# Altium PCB Moo1.1.PcbDoc
Units mil, origin at the board's own origin, x right, y up, seen from the top; angles counter-clockwise.
Board outline 1200 x 889 mil, 4 copper layers (Top Layer, GND_Plane, Signal_Layer, Bottom Layer), stack 28.2 mil thick; 69 components, 77 nets, 286 pads, 55 vias.
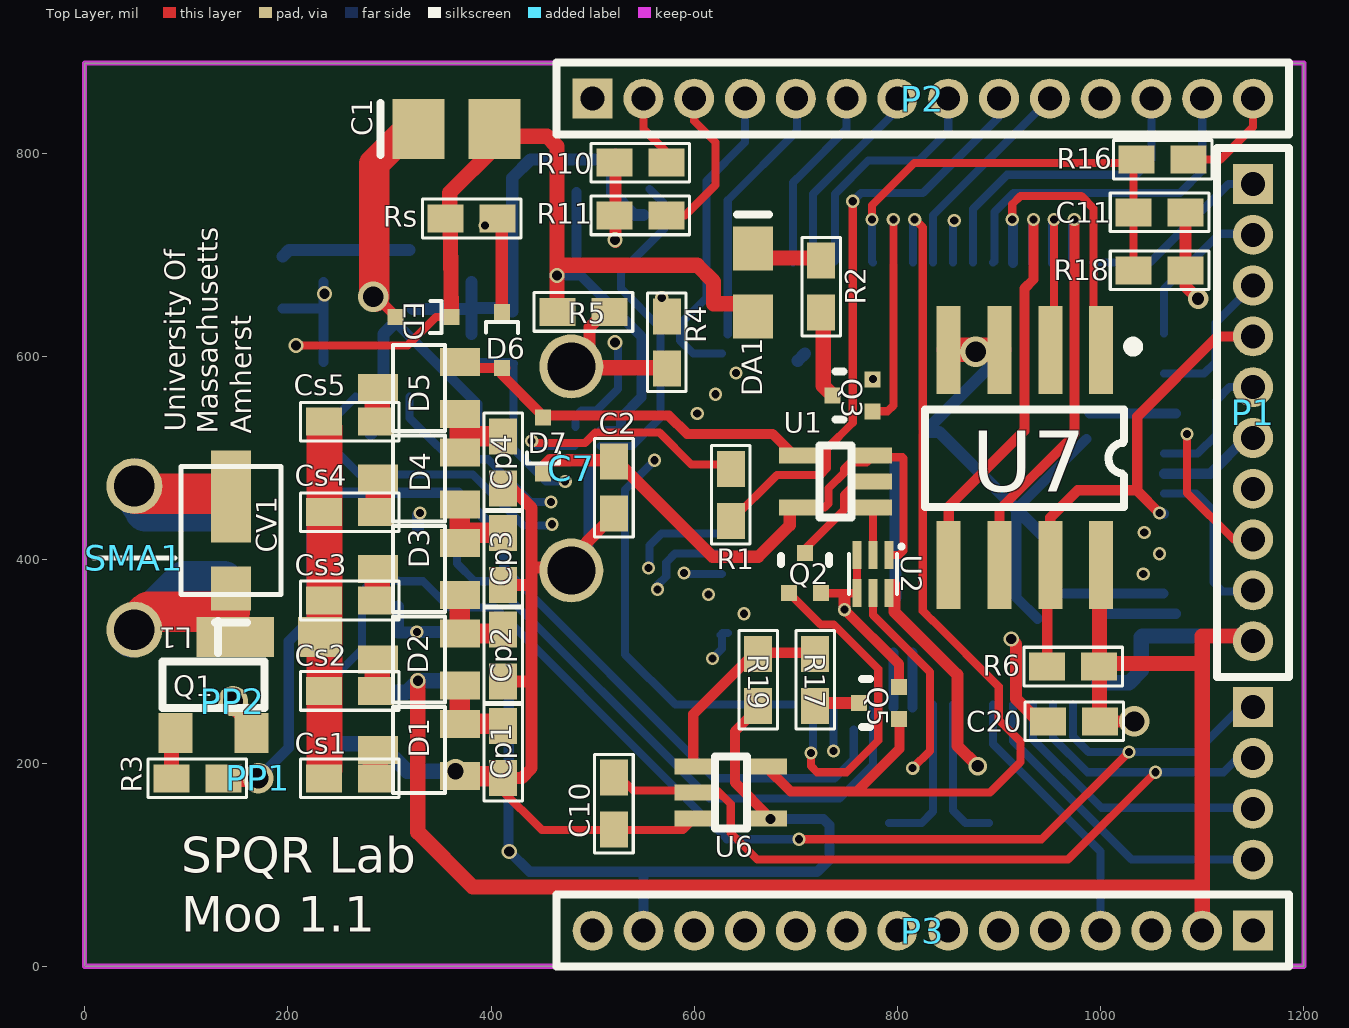
[diagram p0: Top Layer view]
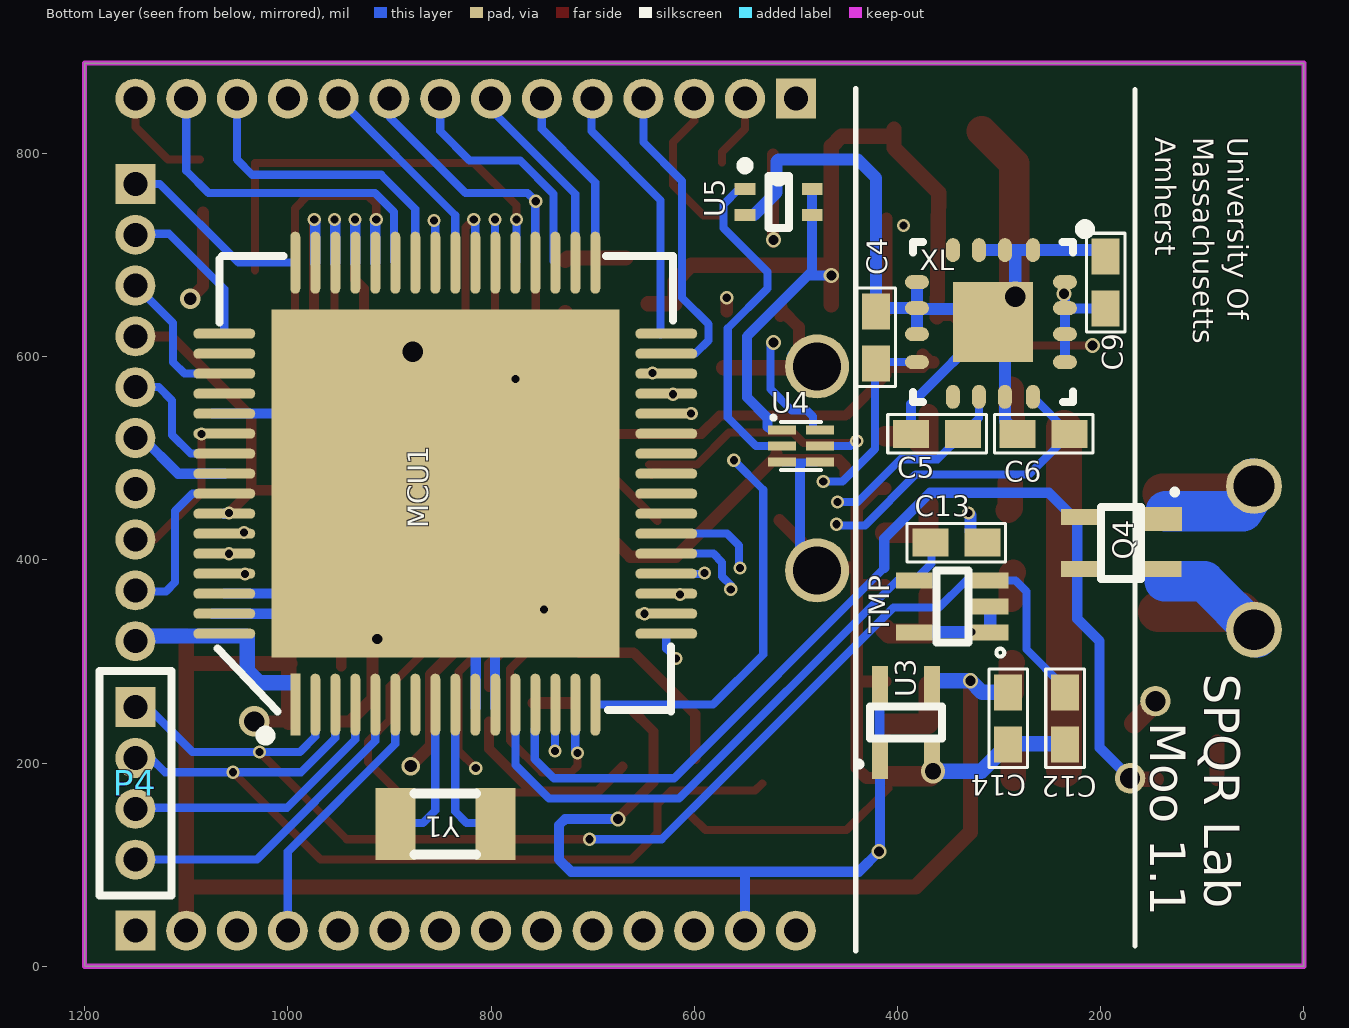
[diagram p1: Bottom Layer view, seen from below]
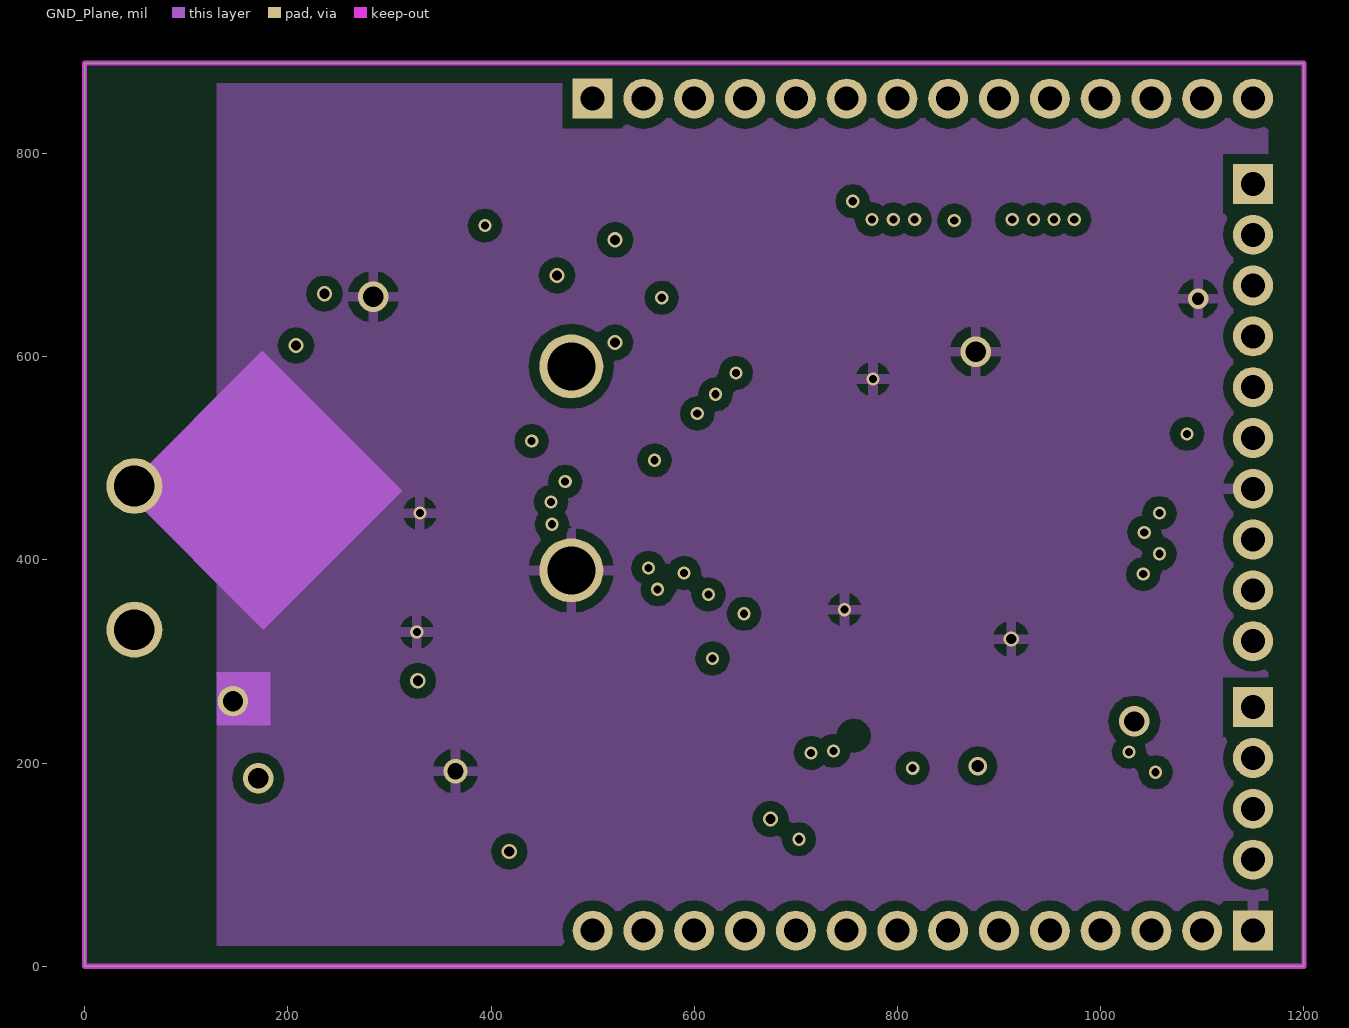
[diagram p2: GND_Plane]
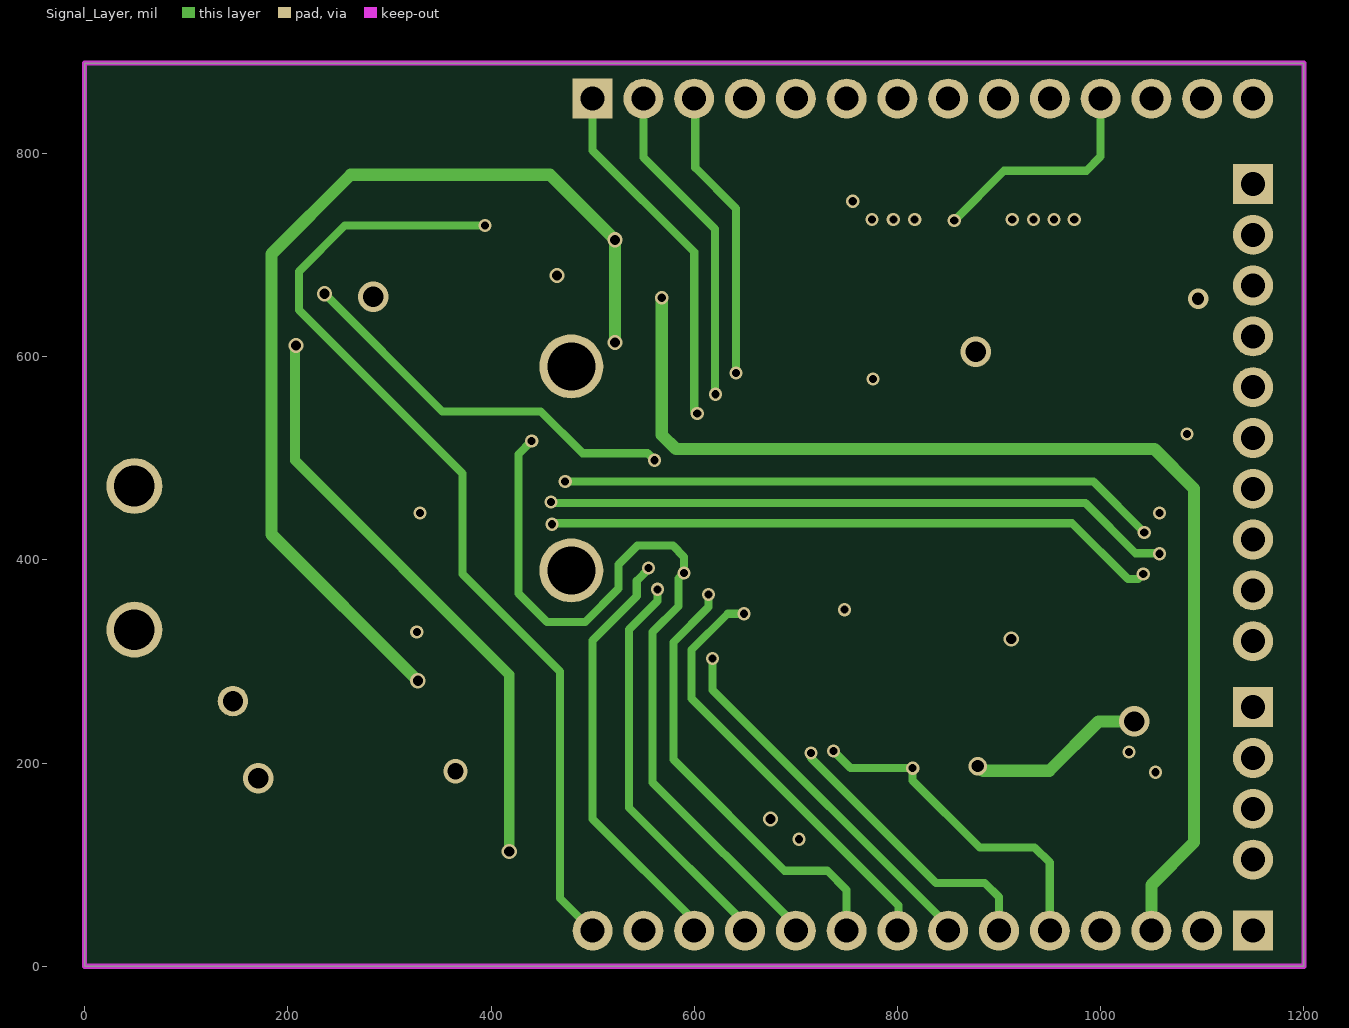
[diagram p3: Signal_Layer]

## Layer stack, top to bottom
Top Layer: signal copper 1.4
Dielectric: prepreg 8.8, FR-4, Dk 4.8
GND_Plane: signal copper 1.4
Dielectric: core 5, FR-4, Dk 4.8
Signal_Layer: signal copper 1.4
Dielectric: prepreg 8.8, FR-4, Dk 4.8
Bottom Layer: signal copper 1.4

## Board outline
0,0 1200,0 1200,889 0,889

## Design rules (kind name [scope] priority, off if disabled: settings)
Clearance Clearance_Inner [(OnLayer('GND_Plane') OR OnLayer('Signal_Layer'))] p1: gap=10
Clearance Clearance_Outer [(OnLayer('Bottom Layer') OR OnLayer('Top Layer'))] p2: gap=7
Clearance Clearance_Via_Inner [isVia vs (OnLayer('GND_Plane') OR OnLayer('Signal_Layer'))] p3: gap=10
Clearance Clearance_Via_Outer [isVia vs (OnLayer('Bottom Layer') OR OnLayer('Top Layer'))] p4: gap=7
Clearance Clearance_Via_Via [isVia or isPad vs isVia or isPad] p5: gap=7
Clearance Clearance_Default [All] p6: gap=10
PolygonConnect [All] p1: connectstyle=Relief reliefconductorwidth=10 reliefentries=4 polygonreliefangle="90 Angle"
RoomDefinition Moo_Top [InComponentClass('Moo_Top')] p1: confinementstyle=ConfineIn formatcopy=TRUE lockcomponents=FALSE outline -108,-3064 1276,-3064 1276,3376 -108,3376
RoomDefinition Sensors [InComponentClass('Sensors')] p2: confinementstyle=ConfineIn formatcopy=TRUE lockcomponents=FALSE outline 1432,-234 -306,-234 -306,1078 1432,1078
RoomDefinition Digital_1 [InComponentClass('Digital_1')] p3: confinementstyle=ConfineIn formatcopy=TRUE lockcomponents=FALSE outline 1546,-311 -445,-311 -445,1171 1546,1171
RoomDefinition AFE [InComponentClass('AFE')] p4: confinementstyle=ConfineIn formatcopy=TRUE lockcomponents=FALSE outline 1367,-112 -171,-112 -171,1012 1367,1012
RoutingVias [All] p1: holewidth=28 width=50 viastyle="Through Hole" minholewidth=28 minwidth=50 maxholewidth=28 maxwidth=50
SilkscreenOverComponentPads [All] p1: minsilkscreentomaskgap=10
SolderMaskExpansion [All] p1: expansion=4
TestPointUsage [All] p1: valid=0 allowmultiple=FALSE
Testpoint [All] p1: side=15 testpointundercomponent=TRUE minsize=40 maxsize=100 preferedsize=60 minholesize=0 maxholesize=40 preferedholesize=32 testpointgrid=1 style=1023 order=0-112345678
Width [All] p1: maxlimit=78 minlimit=5 preferedwidth=8 toplayer_minwidth=6 midlayer1_minwidth=6 midlayer2_minwidth=6 midlayer2_maxwidth=40 bottomlayer_minwidth=6 bottomlayer_maxwidth=40 minimp=50.000000 maximp=50.000000 favimp=50.000000
23 further rules are at their usual default settings.

## Classes and differential pairs
component class Digital_1: C7 C14 C20 MCU1 P1 P2 P3 P4 R1 R4 R5 R6 R10 R11 R12 U3 U4 U5 U7 Y1
component class AFE: C1 C2 Cp1 Cp2 Cp3 Cp4 Cs1 Cs2 Cs3 Cs4 Cs5 CV1 D1 D2 D3 D4 D5 D6 D7 ED L1 PP1 PP2 Q1 Q2 Q4 R3 Rs U1 U2
component class Sensors: C4 C5 C6 C9 C10 C11 C12 C13 DA1 Q3 Q5 R2 R12 R16 R17 R18 R19 TMP U6 U? XL
component class Moo_Top: SMA1

## Components (designator, comment, footprint, x,y, rotation, side; value= is the part's Value field where it differs from the comment)
C1 "Ceramic_Chip_Capacitor" 0805 366,824 r0 top
C2 "Ceramic_Chip_Capacitor" 0402 521,471 r270 top
C4 "Ceramic_Chip_Capacitor" 0402 421,619 r270 bottom
C5 "Ceramic_Chip_Capacitor" 0402 361,524 r180 bottom
C6 "Ceramic_Chip_Capacitor" 0402 256,524 r0 bottom
C7 "MaxCap LX 0.1F" "MAXCAP LX 0.1F" 479,490 r270 top locked
C9 "Ceramic_Chip_Capacitor" 0402 195,673 r270 bottom
C10 "Ceramic_Chip_Capacitor" 0402 521,160 r270 top
C11 "Ceramic_Chip_Capacitor" 0402 1058,742 r0 top
C12 "Ceramic_Chip_Capacitor" 0402 235,244 r90 bottom
C13 "Ceramic_Chip_Capacitor" 0402 342,417 r0 bottom
C14 "Ceramic_Chip_Capacitor" 0402 291,244 r90 bottom
C20 "Ceramic_Chip_Capacitor" 0402 974,241 r180 top
Cp1 "Ceramic_Chip_Capacitor" 0402 412,211 r270 top
Cp2 "Ceramic_Chip_Capacitor" 0402 412,306 r270 top
Cp3 "Ceramic_Chip_Capacitor" 0402 412,401 r270 top
Cp4 "Ceramic_Chip_Capacitor" 0402 412,496 r270 top
Cs1 "Ceramic_Chip_Capacitor" 0402 261,185 r0 top
Cs2 "Ceramic_Chip_Capacitor" 0402 261,271 r0 top
Cs3 "Ceramic_Chip_Capacitor" 0402 261,360 r0 top
Cs4 "Ceramic_Chip_Capacitor" 0402 261,447 r0 top
Cs5 "Ceramic_Chip_Capacitor" 0402 261,536 r0 top
CV1 "Var Cap" VAR-CAP_603 144,429 r90 top
D1 "HSMS-285C" "SOT-323, HSMS-285C" 329,213 r90 top
D2 "HSMS-285C" "SOT-323, HSMS-285C" 329,302 r90 top
D3 "HSMS-285C" "SOT-323, HSMS-285C" 329,391 r90 top
D4 "HSMS-285C" "SOT-323, HSMS-285C" 329,480 r90 top
D5 "HSMS-285C" "SOT-323, HSMS-285C" 329,569 r90 top
D6 "RB751S40T1" SOD-523 411,644.12 r0 top
D7 "RB751S40T1" SOD-523 451,485 r180 top
DA1 "SML-311UTT86" LED-0603 658,673 r270 top
ED "ESD5Z3.3T1" SOD-523 361,639 r270 top
L1 "Inductor" 0603 198,324 r0 top
MCU1 "MSP430F261x" 64-PM 845,475 r90 bottom
P1 "MHDR1X10" MHDR1X10 1150,770 r270 top
P2 "MHDR1X14" MHDR1X14#1 500,854 r0 top
P3 "MHDR1X14" MHDR1X14#2 500,35 r0 top
P4 "MHDR1X4" MHDR1X4 1150,255 r270 bottom
PP1 "Probe Point" "PROBE POINT" 171,185 r90 top
PP2 "Probe Point" "Probe Point" 146,261 r0 top
Q1 "BFT25A" SOT-23 127,277 r0 top
Q2 "NTK3134N" SOT723 709,387 r90 top
Q3 "NTK3134N" SOT723 756,562 r180 top
Q4 "BF1212WR" SOT343R 178,417 r90 bottom
Q5 "NTK3134N" SOT723 782,259 r180 top
R1 "Thick Film Chip Resistor" 0402 636,464 r270 top
R2 "Thick Film Chip Resistor" 0402 725,669 r270 top
R3 "Thick Film Chip Resistor" 0402 111,185 r0 top
R4 "Thick Film Chip Resistor" 0402 573,614 r90 top
R5 "Thick Film Chip Resistor" 0402 491,644 r180 top
R6 "Thick Film Chip Resistor" 0402 973,295 r180 top
R10 "Thick Film Chip Resistor" 0402 547,791 r0 top
R11 "Thick Film Chip Resistor" 0402 547,739 r0 top
R16 "Thick Film Chip Resistor" 0402 1061,794 r180 top
R17 "Thick Film Chip Resistor" 0402 719,282 r270 top
R18 "Thick Film Chip Resistor" 0402 1058,685 r0 top
R19 "Thick Film Chip Resistor" 0402 663,282 r90 top
Rs "Thick Film Chip Resistor" 0402 381,736 r0 top
SMA1 "SMA Port" "SMA Port" 49,402 r180 top
TMP "LM94021" SC70 346,354 r90 bottom
U1 "NCS2200SQ2T2G" sc70-5 739,477 r90 top
U2 "NLSV1T244" UDFN6 776,386 r180 top
U3 "NCP583" SC82-AB 365,235 r180 bottom
U4 "NLSV1T244" UDFN6 495,512 r270 bottom
U5 "S-1000C20-I4T1G" SNT-4A 550,765 r180 bottom
U6 "TS5A3166" sc70-5 636,171 r270 top
U7 "SST25WF040" SOIC8 925,500 r270 top
XL "ADXL330" 16-QFN 306,634 r270 bottom
Y1 "FC-135" FC-135 845,140 r0 bottom

## Footprints (in the part's own frame and the unit in brackets; to place one, negate y for a bottom-side part, rotate by r counter-clockwise, add the part's x,y. Pads: shape width x height; smd on the part's side, far side on the other; paste and mask are expansions set on the pad)
16-QFN [mm] "16-QFN, LFCSP (CP-16-5) for ADXL330k"
  rect 2x2 smd: 0(0,0)
  oval 0.6x0.35 smd: 1(-1.8,1) 2(-1.8,0.3) 3(-1.8,-0.35) 4(-1.8,-1) 9(1.867,-1) 10(1.867,-0.35) 11(1.867,0.3) 12(1.867,1)
  oval 0.35x0.6 smd: 5(-1,-1.9) 6(-0.35,-1.9) 7(0.3,-1.9) 8(1,-1.9) 13(1,1.8) 14(0.3,1.8) 15(-0.35,1.8) 16(-1,1.8)
  silkscreen extent -2.45,-2 2,2.42
64-PM [mm] "S-PQFP, 64-Leads, Body 12.2x12.2mm (max), Pitch 0.50mm, IPC Low Density - MSP430x261x"
  rect 8.7x8.7 smd: 0(0,0)
  rect 1.55x0.25 smd: 1(-5.525,3.75)
  oval 1.55x0.25 smd: 2(-5.525,3.25) 3(-5.525,2.75) 4(-5.525,2.25) 5(-5.525,1.75) 6(-5.525,1.25) 7(-5.525,0.75) 8(-5.525,0.25) 9(-5.525,-0.25) 10(-5.525,-0.75) 11(-5.525,-1.25) 12(-5.525,-1.75) 13(-5.525,-2.25) 14(-5.525,-2.75) 15(-5.525,-3.25) 16(-5.525,-3.75) 33(5.525,-3.75) 34(5.525,-3.25) 35(5.525,-2.75) 36(5.525,-2.25) 37(5.525,-1.75) 38(5.525,-1.25) 39(5.525,-0.75) 40(5.525,-0.25) 41(5.525,0.25) 42(5.525,0.75) 43(5.525,1.25) 44(5.525,1.75) 45(5.525,2.25) 46(5.525,2.75) 47(5.525,3.25) 48(5.525,3.75)
  oval 0.25x1.55 smd: 17(-3.75,-5.525) 18(-3.25,-5.525) 19(-2.75,-5.525) 20(-2.25,-5.525) 21(-1.75,-5.525) 22(-1.25,-5.525) 23(-0.75,-5.525) 24(-0.25,-5.525) 25(0.25,-5.525) 26(0.75,-5.525) 27(1.25,-5.525) 28(1.75,-5.525) 29(2.25,-5.525) 30(2.75,-5.525) 31(3.25,-5.525) 32(3.75,-5.525) 49(3.75,5.525) 50(3.25,5.525) 51(2.75,5.525) 52(2.25,5.525) 53(1.75,5.525) 54(1.25,5.525) 55(0.75,5.525) 56(0.25,5.525) 57(-0.25,5.525) 58(-0.75,5.525) 59(-1.25,5.525) 60(-1.75,5.525) 61(-2.25,5.525) 62(-2.75,5.525) 63(-3.25,5.525) 64(-3.75,5.525)
  silkscreen extent -6.42,-5.69 5.69,5.69
0402 [mm] "Chip Capacitor; Body 1.0 x 0.5 mm (LxW typ)"
  rect 0.9x0.7 smd: 1(-0.65,0) 2(0.65,0)
  silkscreen extent -1.23,-0.48 1.23,0.48
0603 [mm] "Chip Capacitor; Body 1.6 x 0.8 mm (LxW typ)"
  rect 1.1x1 smd: 1(-0.85,0) 2(0.85,0)
  silkscreen extent -1.7,-0.4 -1.7,0.4
0805 [mm] "Chip Capacitor; Body 2.0 x 1.2 mm (LxW typ)"
  rect 1.3x1.5 smd: 1(-0.95,0) 2(0.95,0)
  silkscreen extent -1.9,-0.65 -1.9,0.65
FC-135 [mm] "FC-135   crystal - epson eletronics"
  rect 1x1.8 smd: 1(-1.25,0) 2(1.25,0)
  silkscreen extent -0.76,-0.76 0.76,0.76
LED-0603 [mm] "LED SML-311UTT86"
  rect 1.1x1 smd: 1(0.85,0) 2(-0.85,0)
  silkscreen extent -1.7,-0.4 -1.7,0.4
"MAXCAP LX 0.1F" [mm] "Maxcap LX Series, 0.1F, Diameter  11mm, Leads 5.1mm"
  round 1.6 hole 1.2: 1(-2.55,0) 2(2.55,0)
MHDR1X4 [mm] "Connector; Header; 4 Position"
  rect 1x1 hole 0.6: 1(0,0)
  round 1 hole 0.6: 2(1.27,0) 3(2.54,0) 4(3.81,0)
  silkscreen extent -0.9,-0.9 4.71,0.9
MHDR1X10 [mm] "Connector; Header; 10 Position"
  rect 1x1 hole 0.6: 1(0,0)
  round 1 hole 0.6: 2(1.27,0) 3(2.54,0) 4(3.81,0) 5(5.08,0) 6(6.35,0) 7(7.62,0) 8(8.89,0) 9(10.16,0) 10(11.43,0)
  silkscreen extent -0.9,-0.9 12.33,0.9
MHDR1X14#1 [mm] "Connector; Header; 14 Position"
  rect 1x1 hole 0.6: 1(0,0)
  round 1 hole 0.6: 2(1.27,0) 3(2.54,0) 4(3.81,0) 5(5.08,0) 6(6.35,0) 7(7.62,0) 8(8.89,0) 9(10.16,0) 10(11.43,0) 11(12.7,0) 12(13.97,0) 13(15.24,0) 14(16.51,0)
  silkscreen extent -0.9,-0.9 17.41,0.9
MHDR1X14#2 [mm] "Connector; Header; 14 Position"
  round 1 hole 0.6: 1(0,0) 2(1.27,0) 3(2.54,0) 4(3.81,0) 5(5.08,0) 6(6.35,0) 7(7.62,0) 8(8.89,0) 9(10.16,0) 10(11.43,0) 11(12.7,0) 12(13.97,0) 13(15.24,0)
  rect 1x1 hole 0.6: 14(16.51,0)
  silkscreen extent -0.9,-0.9 17.41,0.9
"PROBE POINT" [mil] "35mil Pad, 20mil hole size"
  round 30 hole 20: 0(0,0)
"Probe Point" [mil] "35mil Pad, 20mil hole size"
  round 30 hole 20: 0(0,0)
SC70 [mm] "Ultra low Power LDO - TI"
  rect 0.4x0.92 smd: 1(-0.65,-0.95) 2(0,-0.95) 3(0.65,-0.95) 4(0.65,0.95) 5(-0.65,0.95)
  silkscreen extent -1.25,-1.3 0.9,0.4
sc70-5 [mm] "SC70-5"
  rect 0.4x0.92 smd: 1(-0.65,-0.95) 2(0,-0.95) 3(0.65,-0.95) 4(0.65,0.95) 5(-0.65,0.95)
  silkscreen extent -0.9,-0.4 0.9,0.4
SC82-AB [mm]
  rect 0.4x0.92 smd: 1(-1.323,-0.823) 2(-0.023,-0.823) 3(-0.023,1.077) 4(-1.323,1.077)
  silkscreen extent -1.86,-0.92 0.23,0.53
"SMA Port" [mil] "SMA port for wisp"
  round 55 hole 40: 1(0,70.71) 2(0,-70.71)
  silkscreen extent -40,0 40,0
SNT-4A [mm]
  rect 0.52x0.3 smd: 1(0,0) 2(0,-0.65) 3(1.68,-0.65) 4(1.68,0)
  silkscreen extent -0.09,-0.98 1.09,0.67
SOD-523 [mm] "SOD-523 Footprint"
  rect 0.4x0.4 smd: 1(0,0) 2(0,-1.4)
  silkscreen extent -0.4,-0.53 0.4,-0.25
SOIC8 [mm] "8-Lead SOIC"
  rect 2.2x0.6 smd: 1(-2.709,1.918) 2(-2.709,0.648) 3(-2.709,-0.622) 4(-2.709,-1.892) 5(2.671,-1.892) 6(2.671,-0.622) 7(2.671,0.648) 8(2.671,1.918)
  silkscreen extent -2.92,-2.49 1.22,2.84
SOT343R [mm] "SOT343R Package for BF1212"
  rect 0.6x0.92 smd: 1(0.584,-1.016)
  rect 0.4x0.92 smd: 2(-0.664,-1.007) 3(-0.664,1.093) 3(0.636,1.093)
  silkscreen extent -0.91,-1.3 1.27,0.54
SOT723 [mm] "SOT723, 3-Leads, Body 1.3x1.3mm (max), Pitch 0.40mm, IPC Medium Density"
  rect 0.4x0.4 smd: 1(-0.5,0.4) 2(-0.5,-0.4) 3(0.5,0)
  silkscreen extent 0.23,-0.6 0.43,0.6
SOT-23 [mm] "SOT-23; 3 Leads; Body 3.0 x 2.5 mm, inc. leads (LxW max)"
  rect 0.85x1 smd: 1(-0.95,-1.2) 2(0.95,-1.2) 3(0,1.2)
  silkscreen extent -1.27,-0.58 1.28,0.58
"SOT-323, HSMS-285C" [mm] "SOT-323/SC-70; 3 Leads; HSMS-285C"
  rect 0.7x1 smd: 1(-0.65,-1.025) 2(0.65,-1.025) 3(0,1.025)
  silkscreen extent -1.07,-0.65 1.07,0.65
UDFN6 [mm] "UDFN6 - Level Shifter -  NLSV1T244"
  rect 0.22x0.7 smd: 1(-0.4,-0.477) 2(0,-0.477) 3(0.4,-0.477) 4(0.4,0.477) 5(0,0.477) 6(-0.4,0.477)
  silkscreen extent -0.76,-0.74 0.6,0.5
VAR-CAP_603 [mm] "Var-Cap 603 Compatible, DK: 490-2009 & SG2026CT"
  rect 1.1x1 smd: 1(-1.45,0)
  rect 2.3x1 smd: 2(0.85,0)
  silkscreen extent -2.3,-1.25 1.6,1.25

## Part data
C1 C2 C4 C5 C6 C9 C10 C11 C12 C13 C14 C20 Cp1 Cp2 Cp3 Cp4 Cs1 Cs2 Cs3 Cs4 Cs5: "Ceramic Capacitor - Standard"
C7: "MaxCap LX 0.1F, low leakage supper cap 5.5v"
CV1: library part Var-Cap/603, "Var-Cap 603 Compatible, DK: 490-2009 & SG2026CT"
D1 D2 D3 D4 D5: "Agilent Schottky Diode, Bridge Quad, HSMS-285C"
D6: library part HSMS-285C, "Agilent Schottky Diode, Bridge Quad, HSMS-285C"
D7: library part "Schottky Diode", "Schottky Diode"
ED: "5V Overvoltage Protection Zener"
MCU1: library part MSP430x261x, "64PM MSP430F261x"
P4: library part MHDR1X3, "Header, 3-Pin"
PP1: "Probe Point for debug"
Q1: "NPN 5 GHz Wideband Transistor"
Q2 Q3 Q5: "Powe Mosfet 20V, 890mA, Single N-channel"
Q4: library part BF1212
SMA1: "Two pin SMA connector wisp"
TMP: "Temperature Sensor"
U1: "On Semi 10uA Comparator"
U2 U4: "Level Shifter: 1-Bit Dual-Supply Non-Inverting Level Translator"
U3: "Ultra-Low Iq 150mA CMOS LDO Regulator with Enable"
U5: library part S1000C30-N4T, "Ultra-small package High precision protection(SC82-AB)"
U6: "TI Analog Switch 100nA 1ohm Normally Open"
XL: library part ADXL330k, "Analog Devices 3D Accelerometer"
Y1: library part MC-146, "FC-135 Crystal D-K SE2416CT (MC-146)"

## Via types
v1: diameter 13, hole 8, Top Layer to Bottom Layer, tented both sides, 40 vias
v2: diameter 15, hole 10, Top Layer to Bottom Layer, tented both sides, 9 vias
v3: diameter 30, hole 20, Top Layer to Bottom Layer, tented both sides, 2 vias
v4: diameter 18, hole 12, Top Layer to Bottom Layer, tented both sides, 1 vias
v5: diameter 30, hole 20, Top Layer to Bottom Layer, 1 vias
v6: diameter 24, hole 16, Top Layer to Bottom Layer, tented both sides, 1 vias
v7: diameter 20, hole 12, Top Layer to Bottom Layer, tented both sides, 1 vias

## Nets (pads, with @x,y where several pads share a name; then routed paths per layer and width w, separated by ;. In a path a pad name is that pad's centre, name@x,y a point inside that pad or via, vN(x,y) a via of type N, cw(c..) or ccw(c..) an arc to the next point about the centre after c; other vN are vias at no path point)
ANT: CV1.1 L1.1 Q1.3 Q4.2 SMA1.1 | length 213.9
  Top Layer w40: SMA1.1@50,336 63,349 143,349
  Bottom Layer w40: SMA1.1@46,324 46,327 98,379 137,379
"BIT PWR": C2.1 D7.1 U1.3 U1.5 U2.1 | length 570.2
  Top Layer w8: U1.5 728.41,451.41 732.29,455.29 732.29,470.53 747.29,485.53 747.29,489.43 753.74,495.87 769.68,495.87 U1.3 777.99,501 805,501 806,500 806,409 801.8,404.8 U2.1
  Top Layer w12: D7.1@451,484 451,491 458,498 496,498 C2.1@521,498 ; C2.1@519,504.59 519,502 618,403 663,403 694,434 U1.5@694,448
BITLINE: D5.2 D6.2 D7.2 U1.4 | length 395
  Top Layer w10: D5.2@377.41,594.59 D5.2 374.94,589 D6.2@414,589 ; D6.2@411,588 411,582 451,542 575,542 593,524 677,524 U1.4@697,504
  Top Layer w12: D5.2@364.41,594.59 D5.2 ; D5.2@370,597 D5.2@375,602 ; D5.2@370.76,596 D5.2 ; D5.2@371,594.59 D5.2
CAPSENSE: C11.1 MCU1.37 R16.2 R18.1 | length 437.2
  Top Layer w8: v1(775,735) 775,749 816.59,790.59 1032.41,790.59 R18.1
  Bottom Layer w8: v1(775,735) 775,693.62 MCU1.37
CAPSENSELINE: P2.14 R16.1 | length 104.7
  Top Layer w8: R16.1 1118,794 1150,826 P2.14
CE#: MCU1.44 U7.1 | length 287.3
  Top Layer w8: v1(913,735) 913,750 921,758 981,758 993,746 993,614.14 U7.1
  Bottom Layer w10: MCU1.44 v1@913.9,734.1
CLK_A: MCU1.28 P2.1 | length 352.7
  Signal_Layer w8: P2.1 500,803 600,703 600,547 v1(603,544)
CLK_B: MCU1.31 P2.4 | length 310.4
  Bottom Layer w8: MCU1.31 627.43,603 599.01,603 585.97,616.04 585.97,631.97 612,658 612,773 650,811 P2.4@650,853
COMPA: U1.1 U2.2 | length 46.2
  Top Layer w8: U2.2 U1.1@776,451.01
COMPFOOT: Q2.3 U1.2 | length 107.6
  Top Layer w8: Q2.3 709,410.83 734.58,436.41 747.29,449.08 747.29,463.84 760.45,477 U1.2
CONTROL: Q1.1 R3.1 | length 35.4
  Top Layer w15: R3.1 Q1.1@85.41,220.41
CURRENT_SENSOR: D6.1 P3.1 Rs.2 | length 1061.8
  Top Layer w12: D6.1@410.59,644.53 Rs.2@410.59,736
  Signal_Layer w8: v1(394,729) 256,729 211,684 211,646 372,485 372,386 468,290 468,67 P3.1
FEEDER: Cs1.1 Cs2.1 Cs3.1 Cs4.1 Cs5.1 L1.2 | length 336.4
  Top Layer w35.43: Cs1.1@236,193.59 Cs5.1@236,530
GND: C1.1 C2.2 C4.1 C5.1 C6.2 C7.2 C9.1 C10.2 C11.2 C12.1 C13.1 C14.1 C20.2 Cp1.2 Cp2.2 Cp3.2 Cp4.2 CV1.2 D1.1 ED.2 MCU1.0 MCU1.10 MCU1.11 MCU1.53 MCU1.62 MCU1.63 P1.7 P3.14 PP2.0 Q1.2 Q2.2 Q3.2 Q4.1 Q5.2 R18.2 SMA1.2 TMP.1 TMP.2 TMP.5 U2.3 U2.4 U3.2 U4.3 U4.4 U5.2 U6.3 U7.3 U7.4 XL.0 XL.1 XL.2 XL.3 XL.5 XL.6 XL.7 XL.11 | length 3876.2
  Top Layer w8: Cp1.2@409,175 450,134 589,134 U6.3@603,148 ; C7.2@483,379 C7.2@487,375 ; C7.2@492,381 C7.2@492,383 ; Q2.2@724.86,367.2 U2.4 U2.3
  Top Layer w10: v5@292,654 305.88,640.12 ED.2 ; v1(748,351) 801.68,297.32 Q5.2
  Top Layer w12: Cp1.2 430.41,185.41 440,195 440,451 421,470 412.41,470 Cp4.2 ; Cp2.2 439.59,280.41 ; Cp3.2 439.59,375.41 440,375 ; 443,392.41 C7.2@470.59,392.41 ; C7.2@494,401 494,417 C2.2@516,439 ; Q2.2 Q2.2@724.86,367.2 ; v1(748,351) 748,363 ; v2(912,322) 916.69,317.31 916.69,263.31 939,241 C20.2 ; C11.2 R18.2 1083.59,669.41 v7(1096,657)
  Top Layer w20: PP2.0@145,262 145,261 Q1.2@167,239 ; PP2.0@147,259 PP2.0@147,263 ; D1.1@367.35,187 Cp1.2@408,187
  Top Layer w24: U7.4 U7.3
  Top Layer w30: v5@285,659 285,790 C1.1@317,822
  Top Layer w40: SMA1.2@50,465 CV1.2@139,465
  Bottom Layer w8: C7.2@479,408 C7.2@481,410 ; U4.4@480,496 U4.3@512,496
  Bottom Layer w10: XL.0 386.59,553.41 C5.1 ; C7.2@494,389 496,391 496,494 ; MCU1.11@796,255 MCU1.0@796,308.99 ; MCU1.10@815,255 MCU1.0@815,308.52 ; MCU1.0@938,342 917,363 917,450 MCU1.0@986,519 ; MCU1.0@952.75,367 MCU1.62@1062,367 ; MCU1.0@989,544 MCU1.53@1074,544 ; MCU1.0@1006,347 MCU1.63@1073.95,347
  Bottom Layer w12: C9.1 201.28,704.87 XL.2 ; C6.2 294.19,536.6 294.19,622.19 XL.0 ; XL.0@284,656 284,703 296,703 296,704.87 XL.3 ; TMP.2 TMP.1 326.41,328.41 v1(327,329) 382.81,329 TMP.5 ; XL.0@323,647 XL.6@380.8,647 ; C13.1@328,428 328,444 v1(330,446) ; XL.7 XL.5 ; XL.6 417.81,647.78 C4.1 421,776 439,794 517,794 519,792 519,761.47 541.06,739.41 U5.2 ; MCU1.0@702,596 MCU1.0@709,603 ; MCU1.0@798,363 MCU1.0@798,497 ; MCU1.0@895.9,594.9 827,526 841,526 MCU1.0@949.27,417.73
  Bottom Layer w15: C12.1@235,219 C14.1@283,219 ; C14.1 317.41,192 U3.2@369,192
  Bottom Layer w40: SMA1.2@51,480 51,462 60,448 Q4.1@136,448
  other v1: 776,578
  other v3: 877,605
  other v5: 284,659
  other v6: 365,192
LED1: DA1.2 R2.1 | length 60.5
  Top Layer w15: DA1.2@667.46,697 724.59,697 R2.1@727,694.59
LED2: Q3.3 R2.2 | length 85.3
  Top Layer w15: R2.2@727,643.41 727,571.31 Q3.3
LED_CTL_1: MCU1.38 Q3.1 | length 246
  Top Layer w8: Q3.1@777.68,546.25 790.25,546.25 796,552 v1(796,735)
  Bottom Layer w8: MCU1.38@796,692.73 v1(796,735)
MAXCAP: C7.1 R4.1 R5.1 | length 165.4
  Top Layer w12: C7.1@480,609 C7.1@484,609 ; C7.1@497,602 497,629 R5.1@514,646 ; R5.1@514,641 R5.1@514,649 ; R5.1@515,640 R5.1@515,641 ; R5.1@515,644 R5.1@515,649
  Top Layer w15: C7.1@498,589 R4.1@571,589
  Bottom Layer w8: C7.1@481,602 C7.1@504.31,602
MCLK: MCU1.48 P1.1 | length 189.5
  Bottom Layer w8: MCU1.48 1048.52,692.52 1126,770 P1.1
NetCs1_2: Cs1.2 D1.3 | length 28
  Top Layer w25: Cs1.2@286,185 D1.3@286,213
NetCs2_2: Cs2.2 D2.3 | length 29.4
  Top Layer w25: D2.3@287,299 288,298 Cs2.2@288,270
NetCs3_2: Cs3.2 D3.3 | length 27.8
  Top Layer w25: D3.3@286,388 288,386 Cs3.2@288,361
NetCs4_2: Cs4.2 D4.3 | length 27.8
  Top Layer w25: D4.3@289,476 289,451 Cs4.2@291,449
NetCs5_2: Cs5.2 D5.3 | length 28.4
  Top Layer w25: Cs5.2@287,540 288,541 D5.3@288,568
NetQ5_3: Q5.3 R17.2 | length 36.4
  Top Layer w12: R17.2@721.59,259 Q5.3@758,259
P15: MCU1.17 P3.8 | length 394.5
  Signal_Layer w8: v1(618,303) 618,272 P3.8@849.5,40.5
  Bottom Layer w8: v1(618,303) 627.48,312.48 MCU1.17 ; MCU1.17@626.12,326 626.12,326.24 627.88,328 MCU1.17@633,328
P16: MCU1.18 P3.7 | length 428
  Signal_Layer w8: v1(649,347) 633.01,347 597.5,311.49 597.5,263.5 801,60 P3.7@801,34
P17: MCU1.19 P3.6 | length 441.5
  Signal_Layer w8: v1(614,366) 614,353.45 579.5,318.95 579.5,203.5 689,94 731,94 750,75 P3.6@750,34
P21: MCU1.21 P3.4 | length 482
  Signal_Layer w8: v1(564,371) 564,359.35 536,331.35 536,156 P3.4@654,38
  Bottom Layer w8: v1(564,371) 564,375.25 572.5,383.75 572.5,397.5 581.1,406.1 MCU1.21
P22: MCU1.22 P3.3 | length 512.4
  Signal_Layer w8: v1(555,392) 555,390.99 543.5,379.49 543.5,364.31 500,320.81 500,145 P3.3@602,43
  Bottom Layer w8: v1@556,392 556,414 567.79,425.79 MCU1.22
P36: MCU1.34 P2.7 | length 195.8
  Bottom Layer w8: MCU1.34 717.05,760.05 800,843 P2.7
P37: MCU1.35 P2.8 | length 237.5
  Bottom Layer w8: MCU1.35 738.5,694.29 738.5,760.25 771.25,793 821,793 850,822 P2.8
P40: MCU1.36 P2.9 R1.2 | length 646.3
  Top Layer w8: R1.2 681.31,483.72 724.26,483.72 730.71,490.16 730.71,509.71 756,535 v1(756,753)
  Bottom Layer w8: v1(756,753) 764,761 825,761 900,836 P2.9 ; MCU1.36 v1@756.42,753
P44: MCU1.40 P2.10 | length 209
  Bottom Layer w8: MCU1.40 835.16,739.16 P2.10
P45: MCU1.41 P2.11 | length 269.1
  Signal_Layer w8: v1(856,734) 905,783 986,783 1000,797 P2.11
  Bottom Layer w8: MCU1.41 854.84,732.84 v1(856,734)
P46: MCU1.42 P2.12 | length 308.6
  Bottom Layer w8: MCU1.42 874.53,745.53 908,779 1035,779 1050,794 P2.12
P47: MCU1.43 P2.13 | length 342.6
  Bottom Layer w8: MCU1.43 895.5,693.81 895.5,742.25 914.25,761 1078,761 1100,783 P2.13
P63_A3: C12.2 MCU1.2 P4.1 TMP.3 | length 1241.2
  Top Layer w8: v1(703,125) 942,125 v1(1028,211)
  Bottom Layer w8: C12.2@237,276 273,312 273,369 283.59,379.59 TMP.3 309.19,379 333,379 359,353 404,353 574,183 632,125 v1(703,125) ; MCU1.2 973,257.43 973,226.13 988.13,211 v1(1028,211) 1094,211 1138,255 P4.1
P64_A4: C10.1 MCU1.3 P4.2 U6.2 | length 852.7
  Top Layer w8: C10.1@533,180 540,173 622.55,173 636,159.55 636,131 662,105 968,105 v1(1054,191)
  Bottom Layer w8: MCU1.3 953.27,224.65 986.92,191 v1(1054,191) 1121,191 1135,205 P4.2@1149,205
P65_A5: MCU1.4 P4.3 | length 284.4
  Bottom Layer w8: MCU1.4 933.58,223.12 1000.7,156 1136,156 P4.3@1150,170
P66_A6: MCU1.5 P4.4 | length 326.5
  Bottom Layer w8: MCU1.5 913.9,221.59 1030.49,105 1135,105 P4.4@1150,120
P67_A7: MCU1.6 P3.11 | length 266.3
  Bottom Layer w8: MCU1.6 894.21,218.79 1000,113 P3.11
RECEIVE: MCU1.14 P3.10 U2.5 | length 581.2
  Top Layer w8: U2.5 776,345.63 832,289.63 832,212 v1(815,195)
  Signal_Layer w8: v1(737,212) 754,195 v1(815,195) 815,183 881,117 935,117 950,102 P3.10@950,34
  Bottom Layer w8: v1(737,212) MCU1.14@737,257.21
RECEIVE_ENABLE: MCU1.15 P3.9 Q2.1 | length 611.1
  Top Layer w8: Q2.1 724.26,336.31 737.34,336.31 781.19,292.45 781.19,222.19 750,191 721,191 715,197 v1@715,209.25
  Signal_Layer w8: v1(715,210) 715,205 838,82 886,82 900,68 P3.9
  Bottom Layer w8: v1(715,210) 717.05,212.05 MCU1.15
RST: MCU1.58 P1.4 R6.2 U7.7 | length 549.7
  Top Layer w10: R6.2 U7.7@947.41,391.77 ; U7.7 950.5,441.5 977.5,468.5 ; v1@1059,445 1035.5,468.5 977.5,468.5 ; P1.4 1115,620 1036,541 1036,470 1034.5,468.5 977.5,468.5
  other v1: 1058,446
RX_SOMI_A: MCU1.33 P2.6 | length 183.3
  Bottom Layer w8: MCU1.33 697.36,771.36 707,781 750,824 P2.6
SCAPCHARGE: P3.12 R4.2 | length 1147.8
  Top Layer w12: R4.2@568,644.59 v1(568,658)
  Signal_Layer w12: v1(568,658) 568,523 582,509 1053,509 1092,470 1092,122 1050,80 P3.12@1050,34
SCK: MCU1.47 U7.6 | length 413.3
  Top Layer w10: U7.6 900.5,449.5 974.31,523.31 v1@974.31,734.69
  Bottom Layer w10: MCU1.47 972.95,733.95 v1(974,735)
SCL_B: MCU1.30 P2.3 R11.2 | length 441.1
  Top Layer w8: R11.2 591,739 621,769 621,811 600,832 P2.3
  Signal_Layer w8: P2.3@601,854 601,786 641,746 v1(641,584)
SDA_B: MCU1.29 P2.2 R10.2 | length 393.5
  Top Layer w8: P2.2 550,824 572.59,801.41 R10.2
  Signal_Layer w8: P2.2 550,796 620.5,725.5 620.5,563.5 v1(621,563) ; v1@621.5,563.5 v1@622,563
SIMO: MCU1.45 U7.5 | length 417.4
  Top Layer w10: U7.5 850.5,452.5 925,527 925,667 934,676 v1(934,735)
  Bottom Layer w10: MCU1.45 933.58,734.58 v1(934,735)
SMCLK: MCU1.49 P1.2 | length 153.9
  Bottom Layer w8: MCU1.49 1062.52,666.52 1117,721 P1.2@1150,721
SOMI: MCU1.46 U7.2 | length 172.6
  Top Layer w8: U7.2 954,610.14 v1(954,735)
  Bottom Layer w10: MCU1.46 953.27,734.27 v1(954,735)
STAGE1: Cp1.1 D1.2 D2.1 | length 81.3
  Top Layer w20: D2.1 D1.2 410,238.59 Cp1.1
STAGE2: Cp2.1 D2.2 D3.1 | length 82.1
  Top Layer w20: D3.1 D2.2 408,327.59 Cp2.1
STAGE3: Cp3.1 D3.2 D4.1 | length 84.6
  Top Layer w20: D4.1 D3.2 379.35,426.59 Cp3.1
STAGE4: Cp4.1 D4.2 D5.1 | length 87.1
  Top Layer w20: D5.1 D4.2 385.35,521.59 Cp4.1
SV_IN: MCU1.20 P3.5 R1.1 U4.5 | length 1128.4
  Top Layer w8: v1(440,517) 442,515 492.36,515 502.66,525.31 565.73,525.31 597.04,494 R1.1@644.28,494 ; R1.1 R1.1@641.87,483.72
  Signal_Layer w8: v1(440,517) 427,504 427,367 455,339 492.73,339 525.5,371.77 525.5,395.5 544,414 579,414 590,403 v1(590,387) 584.5,381.5 584.5,354.4 559,328.9 559,181 P3.5@700.5,39.5
  Bottom Layer w8: v1@440,518 v1@440.5,517.5 ; v1@441,517 446,512 U4.5 U4.5@482,512 ; v1(590,387) 589,387 590,386 MCU1.20@627.06,386
SV_OUT: U4.2 U5.1 | length 336.1
  Bottom Layer w8: U4.2@507.8,512 U4.2 539,512 567,540 567,628 528,667 528,683.53 571.24,726.77 571.24,749.87 U5.1@556.11,765
SVSOUT: MCU1.51 P1.3 | length 145.9
  Bottom Layer w8: MCU1.51 1101.73,583.27 1113,594.54 1113,633 P1.3
TCK: MCU1.57 P1.9 | length 168.3
  Bottom Layer w8: MCU1.57 1093.84,465.16 1111,448 1111,378 1120,369 P1.9@1150,369
TDI: MCU1.55 P1.5 | length 134.5
  Bottom Layer w8: MCU1.55 1095.53,504.53 1114,523 1114,557 1127,570 P1.5
TDO: MCU1.54 P1.8 | length 142.1
  Top Layer w8: v1(1085,524) 1085,466 1131,420 P1.8
TEMP_PWR: C13.2 MCU1.12 TMP.4 | length 605.5
  Bottom Layer w8: C13.2@366.59,424 366.59,396.4 383.99,379 401,379 615,165 743,165 776,198 MCU1.12@776,257
TMS: MCU1.56 P1.6 | length 96.5
  Bottom Layer w10: MCU1.56 1107.84,484.84 P1.6@1144,521
TRANSMIT_RFID: MCU1.13 PP1.0 Q4.3 R3.2 | length 1021.2
  Top Layer w15: R3.2@145,184 172,184 PP1.0@173,185
  Bottom Layer w8: 413,392 620,185 680,185 ; 679,185 738,185 757,204 MCU1.13@757,233
  Bottom Layer w10: PP1.0@170,184 201,215 201,320 223,342 223,438 251,466 368,466 413,421 413,392
TX_SIMO_A: MCU1.32 P2.5 | length 261.2
  Bottom Layer w8: MCU1.32@633,622 633,754 701,822 P2.5@701,855
VOUT: C1.2 DA1.1 ED.1 P3.2 R5.2 R19.1 Rs.1 U3.1 U3.4 U4.1 U5.3 U5.4 U6.4 | length 2460.9
  Top Layer w8: v2@207,611 v2(208,611) 318,611 346,639 ED.1
  Top Layer w10: R19.1@663,254 640,231 640,181 U6.4@674.5,146.5
  Top Layer w15: ED.1 359.41,761.41 403.4,805.4 C1.2 ; C1.2@410,817 455,817 465,807 465,690 603,690 619,674 619,652 DA1.1@645.54,652 ; R5.2@465,651 v2@465,687
  Signal_Layer w10: v2@207,611 207,498 418,287 v2(418,113)
  Bottom Layer w8: U4.1@507.8,527.75 524.75,527.75 528,531
  Bottom Layer w10: U3.1 417.09,113.91 438,93 721,93 733,105 733,139 727,145 v2(675,145) ; U3.1@417.49,203 U3.4@417.49,277 ; v2(465,680) 488,680 ; U5.4@484,762 484,684 488,680 ; 528,531 528,540 548,560 548,620 488,680 ; P3.2 550,92
VREG: C14.2 C20.1 MCU1.1 MCU1.64 P1.10 P3.13 R6.1 R10.1 R11.1 U2.6 U3.3 U4.6 U7.8 | length 3397.1
  Top Layer w12: v2@522.41,713 522.41,739 R10.1@522.41,799 ; 797,375 797,349 859,287 859,217 v4(879,197) ; C20.1 v3(1033,241)
  Top Layer w15: v2(328,281) 328,132 382,78 1100,78 ; R6.1@998,298 1100,298 ; C20.1@999,240 U7.8@999,386 ; P3.13@1100,35.81 1100,78 ; P1.10@1154.5,320.5 1150,325 1100,325 1100,78
  Signal_Layer w12: v2(328,281) 184,425 184,701 262,779 458,779 v2@523,714 ; v2(522,614) v2@522,711 ; v4(879,197) 879.48,197.49 884.5,192.5 949.5,192.5 998,241 v3(1033,241)
  Bottom Layer w8: U4.6@483,531 483,541 489,547 504,547 525,568 v2@525,614
  Bottom Layer w15: C14.2 316.59,269.59 v2(328,281) U3.3@362.31,281 ; 998,279 1028,279 1040,291 1040,324 1041,325 1100,325 P1.10@1152,325
  other v2: 522,715
VSENSE: R17.1 R19.2 U6.1 | length 183.1
  Top Layer w10: U6.1@599,204 599,248 659.59,308.59 R17.1@713,308.59
VSENSE_ENABLE: MCU1.39 Q5.1 U6.5 | length 984.8
  Top Layer w8: 755,171 891,171 921,201 921,221.36 899.69,242.66 899.69,275.31 834.45,340.55 834.13,340.55 825,349.69 825,727 v1(817,735)
  Top Layer w10: U6.5@670.5,196.5 695,172 760,172 802,214 Q5.1@802,241
  Bottom Layer w8: MCU1.39 815.47,733.47 v1(817,735)
XIN: MCU1.8 Y1.2 | length 144.7
  Bottom Layer w8: MCU1.8 854.84,153.16 867,141 Y1.2@890.21,141
XLPWR: C9.2 MCU1.16 XL.13 XL.14 XL.15 XL.16 | length 900.6
  Signal_Layer w8: v2(236,662) 352,546 449,546 490,505 531,505 554,505 v1(561,498)
  Bottom Layer w8: v1@560.5,497.5 532,469 532,307 581.52,257.48 MCU1.16
  Bottom Layer w10: C9.2 233.54,647.41 XL.15@235.13,649 ; XL.13 XL.14 XL.15 XL.16
XLX: C6.1 MCU1.61 XL.12 | length 927.4
  Signal_Layer w8: v1@460,436 972,436 1027,381 1037,381 v1@1043,387 ; v1(1042,386) v1@1042.5,385.5
  Bottom Layer w8: XL.12 266.63,560.22 C6.1 270.41,484 382,484 432,434 v1@460,434
  other v1: 460,435
XLY: C5.2 MCU1.60 XL.10 | length 813
  Signal_Layer w8: v1@460,456 985.01,456 1034.51,406.5 1056.5,406.5 v1@1057,406
  Bottom Layer w8: XL.10 319.78,539.63 C5.2 360.41,499 397,499 439,457 v1(459,457) v1@460,457
  other v1: 1058,406
XLZ: C4.2 MCU1.59 XL.8 | length 779.3
  Signal_Layer w8: v1@473,478 474,477 993,477 v1(1043,427)
  Bottom Layer w8: XL.8 419.78,594.63 C4.2 422.59,593.41 422,592.82 422,509 454,477 v1@470,477
  other v1: 473,477
XOUT: MCU1.9 Y1.1 | length 153.3
  Bottom Layer w8: Y1.1@791.79,141 824,141 835.16,152.16 MCU1.9
pads on no net: MCU1.7 MCU1.23 MCU1.24 MCU1.25 MCU1.26 MCU1.27 MCU1.50 MCU1.52 XL.4 XL.9

## Polygon pours and split planes (outlines as drawn)
GND on GND_Plane "GND_Plane_Pour" (solid, remove dead copper, pour order 1001): 130,869 130,20 1165,20 1165,869
no net on Mechanical 1 "Bottom Layer-No Net" (hatched 45Degree grid 20 track 2, pour order 1000): 441,152 166,152 166,865 440,865 441,863.4

## Keep-outs
Keep-Out Layer:
  the board outline again, w5

## Other copper
GND_Plane:
  rectangle net GND: 130,237 183.09,289.55
  region net GND: 176,331 313,468 175,606 38,469

## Silkscreen, mask and mechanical layers (free items; w line width, h text height)
Top Overlay:
  text "University Of" at 99,526 h20 r90
  text "Massachusetts" at 131,524 h20 r90
  text "Amherst" at 164,524 h20 r90
  text "SPQR Lab" at 95,92 h35
  text "Moo 1.1" at 95,34 h35
Bottom Overlay:
  lines w5: 166,20 166,863 ; 441,15 441,864
  text "University Of" at 75,816 h20 r90
  text "Massachusetts" at 109,816 h20 r90
  text "Amherst" at 146,816 h20 r90
  text "SPQR Lab" at 98,288 h35 r90
  text "Moo 1.1" at 151,240 h35 r90
Mechanical 1:
  lines w5: 166,863 166,150 441,150 441,865